# Altium PCB MY-FRIST-PCB.pcbdoc
Units mm, origin at the board's own origin, x right, y up, seen from the top; angles counter-clockwise.
Board outline 208.03 x 106.93 mm, 2 copper layers (Top Layer, Bottom Layer); 28 components, 36 nets, 138 pads, 18 vias.
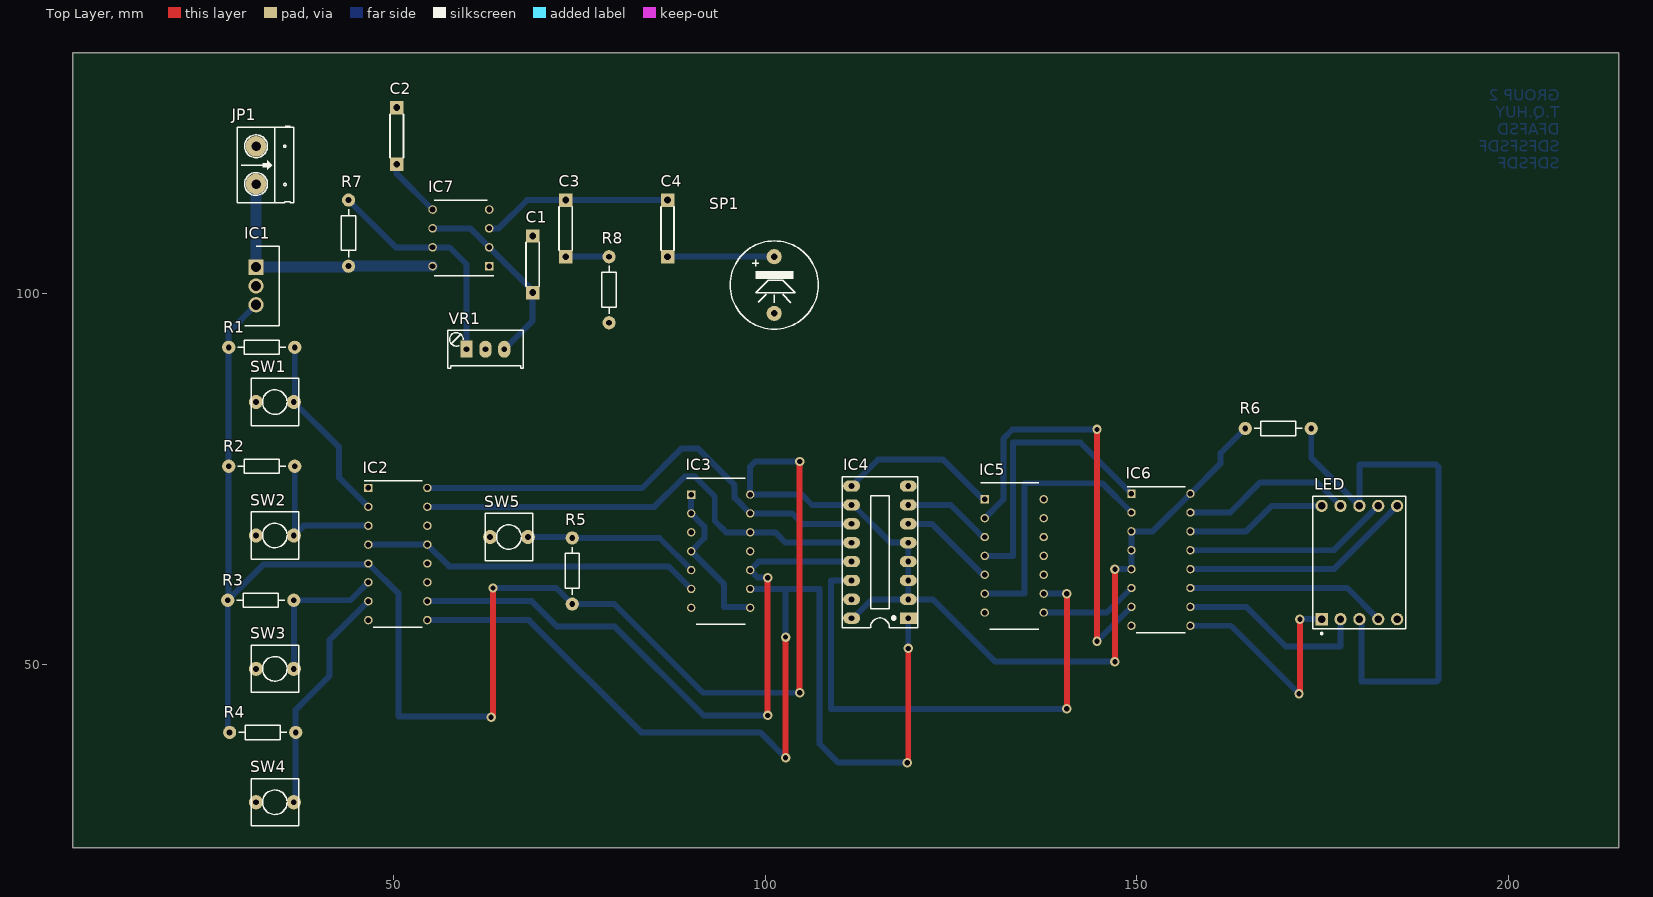
[diagram p0: Top Layer view]
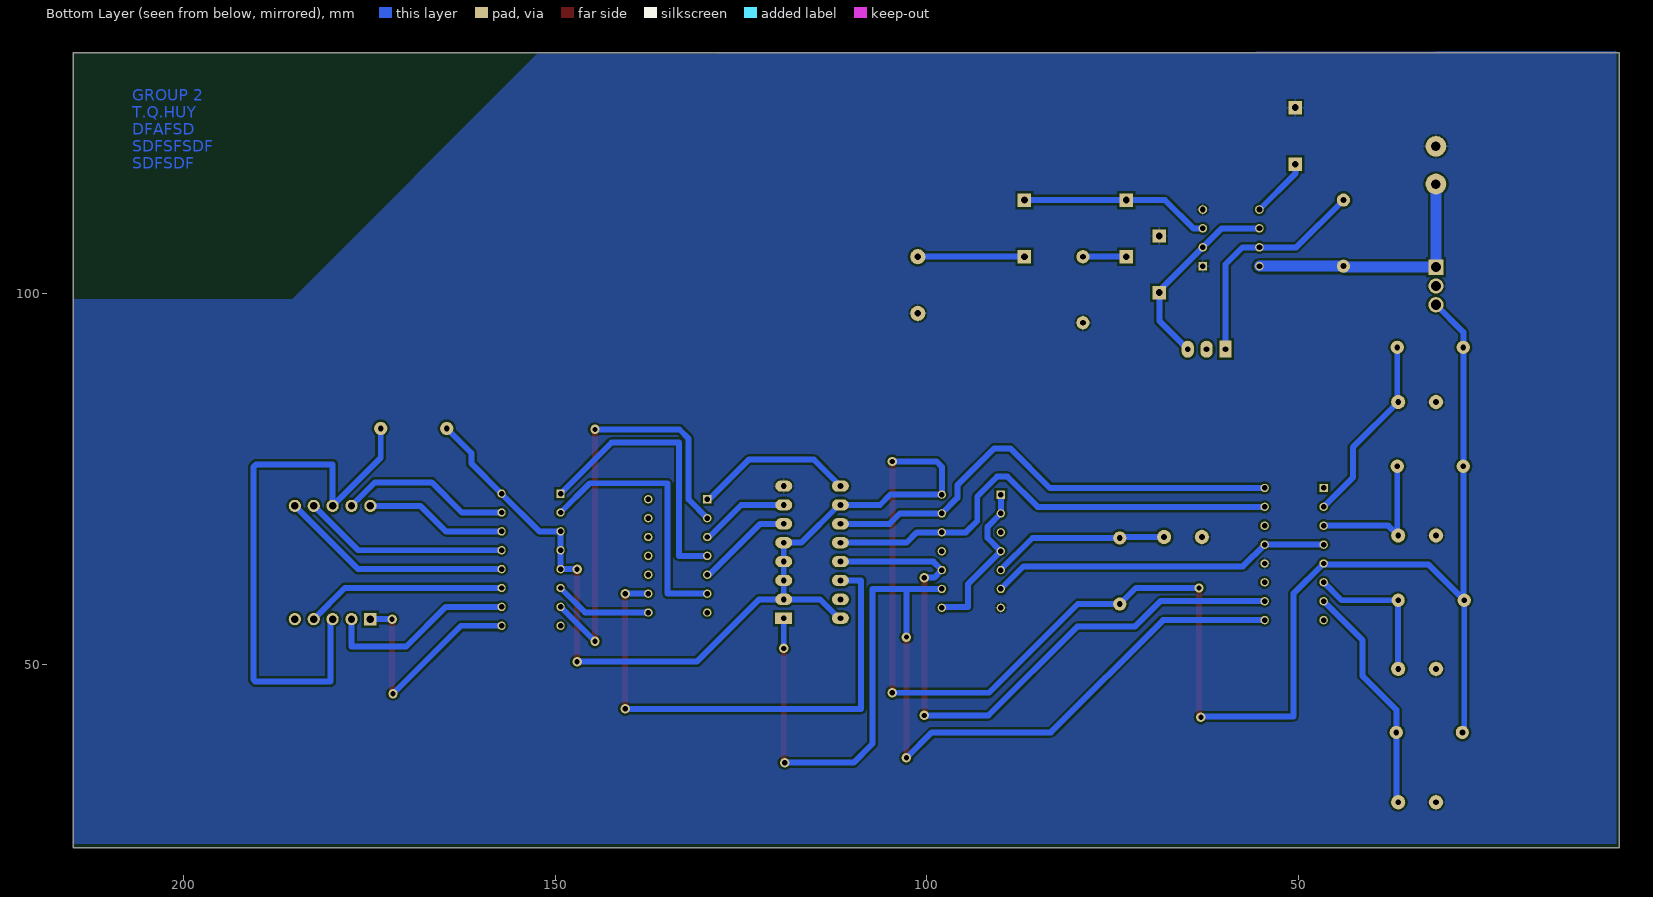
[diagram p1: Bottom Layer view, seen from below]
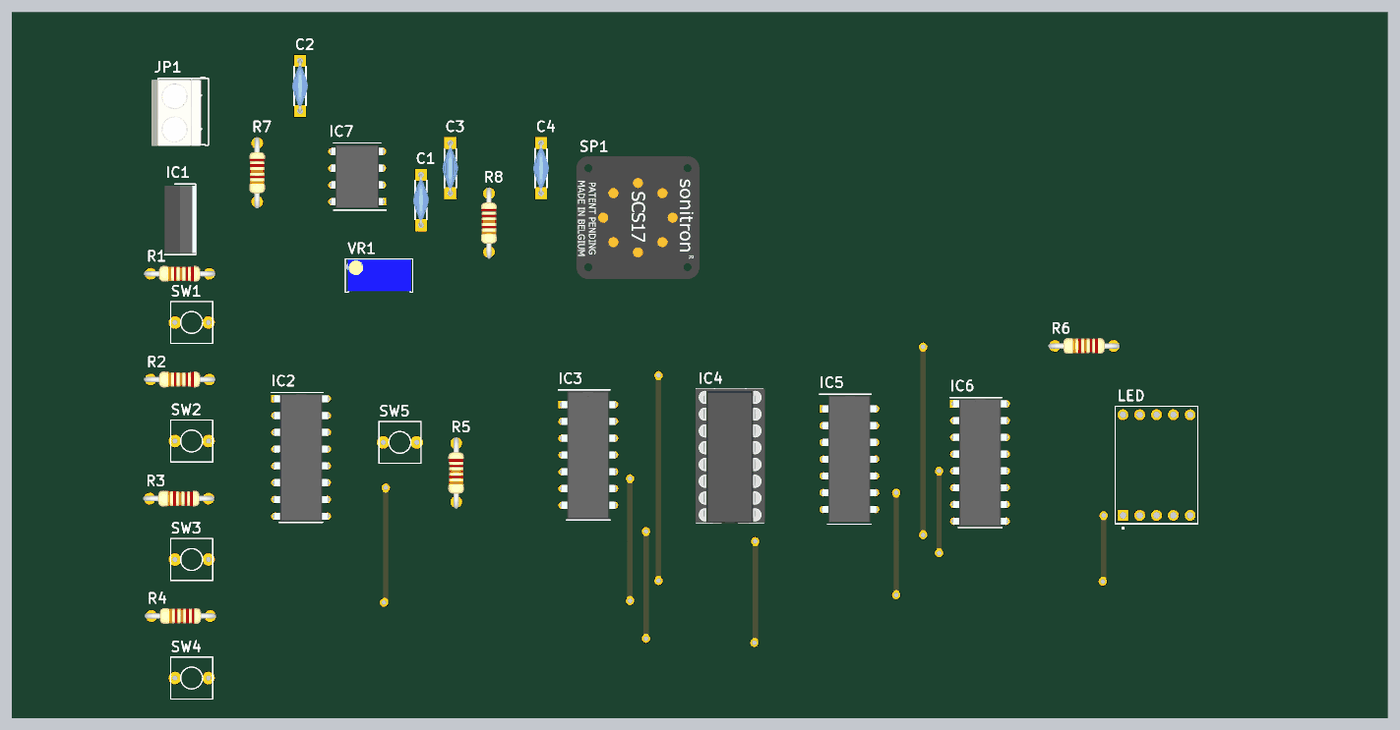
[diagram p2: 3D render of the assembled board from above, using the file's embedded part models]

## Layer stack, top to bottom
Top Solder: solder mask 0.0102, Solder Resist, Dk 3.5
Top Layer: signal copper 0.0356
Dielectric 1: dielectric 0.32, FR-4, Dk 4.8
Bottom Layer: signal copper 0.0356
Bottom Solder: solder mask 0.0102, Solder Resist, Dk 3.5

## Board outline
6.858,25.4 214.884,25.4 214.884,132.334 6.858,132.334

## Design rules (kind name [scope] priority, off if disabled: settings)
Clearance [All] p1: gap=0.3 ignorepadtopadclearanceinfootprint=FALSE
PolygonConnect [All] p1: connectstyle=Relief reliefconductorwidth=0.254 reliefentries=4 polygonreliefangle="90 Angle" airgapwidth=0.254
RoutingVias [All] p1: holewidth=0.711 width=1.27 viastyle="Through Hole" minholewidth=0.711 minwidth=1.27 maxholewidth=0.711 maxwidth=1.27
SolderMaskExpansion [All] p1: expansion=0.102
Width [All] p1: maxlimit=1.5 minlimit=0.8 preferedwidth=0.8
30 further rules are at their usual default settings.

## Components (designator, comment, footprint, x,y, rotation, side; value= is the part's Value field where it differs from the comment)
C1 "0.033u" 103/2KV 68.707,100.076 r90 top
C2 "0.01u" 103/2KV 50.419,117.348 r90 top
C3 "0.047u" 103/2KV 73.152,104.902 r90 top
C4 "47u" 103/2KV 86.868,104.902 r90 top
IC1 "LM7805ACT" TO254P470X1016X2019-3P 31.496,103.5 r270 top
IC2 "SN74LS75N" DIP794W53P254L1930H508Q16N 50.579,64.897 r0 top
IC3 "SN74LS20N" DIP794W53P254L1930H508Q14N 94.013,65.278 r0 top
IC4 "74147" DIP16/W0.3 119.253,56.261 r90 top
IC5 "SN74LS04N" DIP794W53P254L1930H508Q14N 133.51,64.643 r0 top
IC6 "SN74LS47N" DIP794W53P254L1930H508Q16N 153.256,64.135 r0 top
IC7 "NE555N" DIP762W56P254L959H533Q8N 59.055,107.442 r180 top
JP1 "Header 2_1" HED2 31.496,119.761 r270 top value="Header 2"
LED "HDSP-516G" Case-5 179.959,63.754 r0 top
R1 "1k" R1/4W 27.813,92.71 r0 top value="R1/4W - 1K"
R2 "1k" R1/4W 27.813,76.708 r0 top value="R1/4W - 1K"
R3 "1k" R1/4W 27.686,58.674 r0 top value="R1/4W - 1K"
R4 "1k" R1/4W 27.94,40.894 r0 top value="R1/4W - 1K"
R5 "1k" R1/4W 74.041,58.166 r90 top value="R1/4W - 1K"
R6 "330" R1/4W 164.592,81.788 r0 top value="R1/4W - 1K"
R7 "100K" R1/4W 43.942,103.632 r90 top value="R1/4W - 1K"
R8 "10" R1/4W 78.994,96.012 r90 top value="R1/4W - 1K"
SP1 "Speaker" SPK 101.219,104.902 r270 top value="Speaker Chip"
SW1 "SW" SW2 31.496,85.344 r0 top value="SW chip 2 pin"
SW2 "SW" SW2 31.496,67.395 r0 top value="SW chip 2 pin"
SW3 "SW" SW2 31.496,49.445 r0 top value="SW chip 2 pin"
SW4 "SW" SW2 31.496,31.496 r0 top value="SW chip 2 pin"
SW5 "SW" SW2 62.992,67.183 r0 top value="SW chip 2 pin"
VR1 "10K" VR1 59.817,92.456 r0 top

## Footprints (in the part's own frame and the unit in brackets; to place one, negate y for a bottom-side part, rotate by r counter-clockwise, add the part's x,y. Pads: shape width x height; smd on the part's side, far side on the other; paste and mask are expansions set on the pad)
103/2KV [mm]
  rect 1.8x1.8 hole 0.9: 1(0,0) 2(7.62,0)
  silkscreen extent 0.89,-0.89 6.73,0.89, body extent -0.19,-1.2 7.81,1.19, height 9.03
Case-5 [mm] "LED, 7-Segment Display, 13 mm, RHD; 10 Leads; Row Space 15.24 mm; Pitch 2.54 mm"
  rect 1.65x1.65 hole 1: 1(-5.08,-7.62)
  round 1.65 hole 1: 2(-2.54,-7.62) 3(0,-7.62) 4(2.54,-7.62) 5(5.08,-7.62) 6(5.08,7.62) 7(2.54,7.62) 8(0,7.62) 9(-2.54,7.62) 10(-5.08,7.62)
  silkscreen extent -6.25,-9.67 6.25,8.9
DIP16/W0.3 [mil] "16 PIN, W 300mil, Pin to pin 100mil"
  rect 60x90 hole 31: 1(0,0)
  oval 60x90 hole 31: 2(100,0) 3(200,0) 4(300,0) 5(400,0) 6(500,0) 7(600,0) 8(700,0) 9(700,300) 10(600,300) 11(500,300) 12(400,300) 13(300,300) 14(200,300) 15(100,300) 16(0,300)
  silkscreen extent -50,-50 750,350, body extent -52,-57 752,356, height 299
DIP762W56P254L959H533Q8N [mm]
  rect 1.16x1.16 hole 0.76: 1(-3.81,3.81)
  round 1.16 hole 0.76: 2(-3.81,1.27) 3(-3.81,-1.27) 4(-3.81,-3.81) 5(3.81,-3.81) 6(3.81,-1.27) 7(3.81,1.27) 8(3.81,3.81)
  silkscreen extent -4.39,-5.08 3.55,5.08, body extent -3.95,-4.79 3.95,4.79, height 5.33
DIP794W53P254L1930H508Q14N [mm]
  rect 1.13x1.13 hole 0.73: 1(-3.97,7.62)
  round 1.13 hole 0.73: 2(-3.97,5.08) 3(-3.97,2.54) 4(-3.97,0) 5(-3.97,-2.54) 6(-3.97,-5.08) 7(-3.97,-7.62) 8(3.97,-7.62) 9(3.97,-5.08) 10(3.97,-2.54) 11(3.97,0) 12(3.97,2.54) 13(3.97,5.08) 14(3.97,7.62)
  silkscreen extent -4.53,-9.84 3.3,9.84, body extent -4.1,-9.65 4.1,9.65, height 5.08
DIP794W53P254L1930H508Q16N [mm]
  rect 1.13x1.13 hole 0.73: 1(-3.97,8.89)
  round 1.13 hole 0.73: 2(-3.97,6.35) 3(-3.97,3.81) 4(-3.97,1.27) 5(-3.97,-1.27) 6(-3.97,-3.81) 7(-3.97,-6.35) 8(-3.97,-8.89) 9(3.97,-8.89) 10(3.97,-6.35) 11(3.97,-3.81) 12(3.97,-1.27) 13(3.97,1.27) 14(3.97,3.81) 15(3.97,6.35) 16(3.97,8.89)
  silkscreen extent -4.53,-9.84 3.3,9.84, body extent -4.1,-9.65 4.1,9.65, height 5.08
HED2 [mil] "Header 2, 2 pin, hight 300mil, Pin to Pin 200, Colour Green"
  round 110 hole 50: 1(0,0) 2(200,0)
  silkscreen extent -106,-100 300,200, body extent -92,-140 302,155, height 394
R1/4W [mil] "R 1/4W, 2 Pin, 350mil"
  round 70 hole 31: 1(0,0) 2(350,0)
  silkscreen extent 48,-38 302,38, body extent -40,-47 386,47, height 111
SPK [mil] "Speaker Chip"
  round 80 hole 35: 1(0,0) 2(300,0)
  silkscreen extent -84,-234 384,234, body extent -221,-354 511,378, height 344
SW2 [mil] "SW button 2pin, 250x 250 mil"
  round 75 hole 31: 1(0,0) 2(200,0)
  silkscreen extent -25,-125 225,125
TO254P470X1016X2019-3P [mm]
  rect 2.055x2.055 hole 1.37: 1(0,0)
  round 2.055 hole 1.37: 2(2.535,0) 3(5.07,0)
  silkscreen extent -2.8,-1.55 7.87,3.15, body extent -2.55,-1.55 7.61,3.15, height 18.54
VR1 [mil] "Variable Resistor"
  rect 65x90 hole 30: 1(0,0)
  oval 65x90 hole 30: 2(100,0) 3(200,0)
  silkscreen extent -100,-100 301,100, body extent -87,-94 289,96, height 455

## Part data
C1 C2 C3 C4: library part "Cap 2KV", "Capacitor Ceramic 2KV", LatestRevisionDate=17-Jul-2002, LatestRevisionNote="Re-released for DXP Platform.", PackageReference=RAD-0.3, Published=8-Jun-2000, Publisher="Altium Limited"
IC1: "Integrated Circuit", Manufacturer_Name="ON Semiconductor", Mouser Part Number=512-LM7805ACT, Arrow Part Number=LM7805ACT, Arrow Price/Stock=https://www.arrow.com/en/products/lm7805act/on-semiconductor, Datasheet Link=https://componentsearchengine.com/Datasheets/2/LM7805ACT.pdf, Height=4.7mm, Manufacturer_Part_Number=LM7805ACT, Mouser Price/Stock=https://www.mouser.co.uk/ProductDetail/ON-Semiconductor-Fairchild/LM7805ACT?qs=VOMQJJE%252BBNlQknJDd4ZVLg%3D%3D
IC2: "Integrated Circuit", Manufacturer_Name="Texas Instruments", Mouser Part Number=595-SN74LS75N, Arrow Part Number=SN74LS75N, Arrow Price/Stock=https://www.arrow.com/en/products/sn74ls75n/texas-instruments, Datasheet Link=http://www.ti.com/lit/gpn/SN74LS75, Height=5.08mm, Manufacturer_Part_Number=SN74LS75N, Mouser Price/Stock=https://www.mouser.com/Search/Refine.aspx?Keyword=595-SN74LS75N
IC3: "Integrated Circuit", Manufacturer_Name="Texas Instruments", Mouser Part Number=595-SN74LS20N, Datasheet Link=http://www.ti.com/lit/ds/symlink/sn74ls20.pdf, Height=5.08mm, Manufacturer_Part_Number=SN74LS20N, Mouser Price/Stock=https://www.mouser.com/Search/Refine.aspx?Keyword=595-SN74LS20N
IC4: "10-Line to 4-Line Priority Encoder", Copyright by=VanDungEvn@Gmail.com
IC5: "Integrated Circuit", Manufacturer_Name="Texas Instruments", Mouser Part Number=595-SN74LS04N, Arrow Part Number=SN74LS04N, Arrow Price/Stock=https://www.arrow.com/en/products/sn74ls04n/texas-instruments, Datasheet Link=http://www.ti.com/lit/gpn/sn74ls04, Height=5.08mm, Manufacturer_Part_Number=SN74LS04N, Mouser Price/Stock=https://www.mouser.co.uk/ProductDetail/Texas-Instruments/SN74LS04N/?qs=spW5eSrOWB4DgGWIHPxzvg%3D%3D
IC6: "Integrated Circuit", Manufacturer_Name="Texas Instruments", Mouser Part Number=595-SN74LS47N, Arrow Part Number=SN74LS47N, Arrow Price/Stock=https://www.arrow.com/en/products/sn74ls47n/texas-instruments, Datasheet Link=http://componentsearchengine.com/Datasheets/3/SN74LS47N.pdf, Height=5.08mm, Manufacturer_Part_Number=SN74LS47N, Mouser Price/Stock=https://www.mouser.co.uk/ProductDetail/Texas-Instruments/SN74LS47N?qs=dQtLEVC3WoYMgYd%252BWU5Jaw%3D%3D
IC7: "Integrated Circuit", Manufacturer_Name=ST, Mouser Part Number=N/A, Datasheet Link=http://uk.rs-online.com/web/p/products/0305478, Height=5.33mm, Manufacturer_Part_Number=NE555N, Mouser Price/Stock=https://www.mouser.com/Search/Refine.aspx?Keyword=N%2FA
JP1: "Header, 2-Pin", Manufacturer="Generic Components", Class=Connector
LED: "13 mm Slim Font, Standard Current, Green 7-Segment Display: CC, RH DP", LED_Colour=Green, PackageDocument=01-Oct-2001, ComponentLink1Description="Manufacturer Link", ComponentLink1URL=http://www.agilent.com/, ComponentLink2Description=Datasheet, ComponentLink2URL=http://cp.literature.agilent.com/litweb/pdf/5989-2640EN.pdf, DatasheetDocument=20-Jul-2001, LatestRevisionDate=11-Oct-2004, LatestRevisionNote="Display outline superimposed on PCB Footprint.", LuminousIntensity="450 ucd (Minimum).", PackageReference=Case-5, Published=26-May-2004, Publisher="Altium Limited"
R1 R2 R3 R4 R5 R6 R7 R8: library part R1/4W, "Resistor 1/4W"
SP1: library part SPK, "Speaker Chip"
SW1 SW2 SW3 SW4 SW5: library part SW2, "Switch button 2 pin"
VR1: library part VR, "Var Resistor RM065", RM065-103=1K, RM065-104=10K, RM065-503=5K

## Via types
v1: diameter 1.27, hole 0.711, Top Layer to Bottom Layer, 18 vias

## Nets (pads, with @x,y where several pads share a name; then routed paths per layer and width w, separated by ;. In a path a pad name is that pad's centre, name@x,y a point inside that pad or via, vN(x,y) a via of type N, cw(c..) or ccw(c..) an arc to the next point about the centre after c; other vN are vias at no path point)
1Y: IC5.2 IC6.7 | length 59.9
  Top Layer w0.8: v1(144.653,53.152) v1(144.653,81.661)
  Bottom Layer w0.8: IC5.2 132.05,72.233 132.05,80.421 133.29,81.661 v1(144.653,81.661) ; v1(144.653,53.152) IC6.7
2Y: IC5.4 IC6.1 | length 37.8
  Bottom Layer w0.8: IC5.4 133.35,64.643 133.35,79.883 142.428,79.883 IC6.1
3Y: IC5.6 IC6.2 | length 36.2
  Bottom Layer w0.8: IC5.6 134.874,59.563 134.874,74.422 145.349,74.422 IC6.2
5V: IC1.3 IC2.5 IC3.14 IC4.2 IC4.3 IC4.4 IC4.5 IC4.10 IC4.16 IC6.3 IC6.4 IC6.5 IC6.16 R1.1 R2.1 R3.1 R4.1 R5.1 R6.1 | length 334.3
  Top Layer w0.8: v1(63.119,42.926) 63.373,43.18 v1(63.373,60.325) ; v1(104.648,46.228) v1(104.648,77.343) ; v1(147.066,50.419) v1(147.066,62.865)
  Bottom Layer w0.8: R4.1 27.686,41.148 R3.1 R3.1@27.813,58.801 ; IC1.3 27.813,94.747 R1.1 R2.1 R3.1@27.813,58.801 ; v1(63.119,42.926) 62.992,43.053 50.673,43.053 50.673,59.563 IC2.5 46.482,63.5 32.512,63.5 R3.1@27.813,58.801 ; v1(63.373,60.325) 71.882,60.325 R5.1 79.69,58.166 91.628,46.228 v1(104.648,46.228) ; v1(104.648,77.343) 98.684,77.343 97.983,76.642 IC3.14 104.902,72.898 106.299,71.501 IC4.10 111.824,71.501 116.904,66.421 IC4.5 IC4.4 IC4.3 IC4.2 ; IC4.16 111.824,56.261 114.364,58.801 IC4.2 ; v1(147.066,50.419) 130.937,50.419 122.555,58.801 IC4.2 ; v1(147.066,62.865) IC6.5 IC6.4 IC6.3 152.146,67.945 IC6.16 161.29,77.089 161.29,78.486 R6.1
9: IC2.9 IC3.9 IC4.1 | length 141.1
  Top Layer w0.8: v1(102.743,37.465) v1(102.743,53.721) ; v1(119.126,36.83) 119.253,36.957 v1(119.253,52.197)
  Bottom Layer w0.8: IC2.9 68.199,56.007 83.312,40.894 99.314,40.894 v1(102.743,37.465) ; IC3.9 97.994,60.187 100.966,60.187 100.977,60.198 102.743,60.198 ; v1(102.743,53.721) 102.743,60.198 ; v1(119.126,36.83) 109.855,36.83 107.315,39.37 107.315,60.198 102.743,60.198 ; v1(119.253,52.197) IC4.1
10: IC2.10 IC3.10 IC4.13 | length 87.6
  Top Layer w0.8: v1(100.33,43.18) v1(100.33,61.722)
  Bottom Layer w0.8: IC2.10 68.58,58.547 72.009,55.118 79.756,55.118 91.694,43.18 v1(100.33,43.18) ; v1(100.33,61.722) 98.999,61.722 IC3.10 99.126,63.881 IC4.13
12V: IC1.1 IC7.8 JP1.2 R7.1 | length 35
  Bottom Layer w1.5: JP1.2 IC1.1 43.81,103.5 R7.1 IC7.8
15: IC2.15 IC3.12 IC4.12 | length 64.4
  Bottom Layer w0.8: IC2.15 85.09,71.247 89.154,75.311 90.551,75.311 93.218,72.644 93.218,69.342 94.742,67.818 IC3.12 101.346,67.818 102.743,66.421 IC4.12
16: IC2.16 IC3.13 IC4.11 | length 64.5
  Bottom Layer w0.8: IC2.16 83.439,73.787 88.773,79.121 90.932,79.121 95.885,74.168 95.885,72.456 IC3.13 103.632,70.358 105.029,68.961 IC4.11
EN1: IC3.1 IC3.2 IC3.4 IC3.8 | length 22
  Bottom Layer w0.8: IC3.1 IC3.2 91.821,68.58 91.821,67.056 IC3.4 94.488,60.833 94.488,57.785 97.856,57.785 IC3.8
EN2: IC2.4 IC2.13 IC3.6 | length 45.9
  Bottom Layer w0.8: IC2.4 IC2.13 57.47,63.246 86.995,63.246 IC3.6
GND: C1.2 C2.2 IC1.2 IC2.12 IC3.7 IC4.8 IC7.1 IC7.4 JP1.1 R8.1 SP1.2 SW1.1 SW2.1 SW3.1 SW4.1 SW5.1
NetC1_1: C1.1 IC7.2 IC7.6 VR1.3 | length 26.4
  Bottom Layer w0.8: IC7.6 60.325,108.712 IC7.2 68.707,100.33 C1.1 68.707,96.266 VR1.3
NetC2_1: C2.1 IC7.5 | length 8.1
  Bottom Layer w0.8: C2.1 50.419,116.078 IC7.5
NetC3_1: C3.1 R8.2 | length 5.8
  Bottom Layer w0.8: C3.1 R8.2
NetC3_2: C3.2 C4.2 IC7.3 | length 25.6
  Bottom Layer w0.8: IC7.3 64.135,108.712 67.945,112.522 C3.2 C4.2
NetC4_1: C4.1 SP1.1 | length 14.4
  Bottom Layer w0.8: C4.1 SP1.1
NetIC2_2: IC2.2 R1.2 SW1.2 | length 25.7
  Bottom Layer w0.8: R1.2 36.703,85.471 SW1.2 42.672,79.248 42.672,75.184 IC2.2
NetIC2_3: IC2.3 R2.2 SW2.2 | length 19.8
  Bottom Layer w0.8: SW2.2 SW2.2@36.703,67.522 ; R2.2 SW2.2@36.703,67.522 ; IC2.3 37.888,68.707 SW2.2@36.703,67.522
NetIC2_6: IC2.6 R3.2 SW3.2 | length 20.3
  Bottom Layer w0.8: SW3.2 R3.2 44.196,58.674 IC2.6
NetIC2_7: IC2.7 R4.2 SW4.2 | length 31.2
  Bottom Layer w0.8: SW4.2 36.83,31.75 R4.2 36.83,43.942 41.402,48.514 41.402,53.34 IC2.7
NetIC3_5: IC3.5 R5.2 SW5.2 | length 23.9
  Bottom Layer w0.8: SW5.2 73.914,67.183 R5.2 85.786,67.056 IC3.5@90.104,62.738
NetIC4_6: IC4.6 IC5.5 | length 12.9
  Bottom Layer w0.8: IC4.6 122.428,68.961 IC5.5@129.286,62.103
NetIC4_7: IC4.7 IC5.3 | length 11.8
  Bottom Layer w0.8: IC4.7 124.968,71.501 IC5.3@129.286,67.183
NetIC4_9: IC4.9 IC5.1 | length 21.3
  Bottom Layer w0.8: IC4.9 115.189,77.597 123.952,77.597 IC5.1@129.286,72.263
NetIC4_14: IC4.14 IC5.9 | length 70.6
  Top Layer w0.8: v1(140.589,44.069) v1(140.589,59.563)
  Bottom Layer w0.8: IC4.14@111.506,61.214 IC4.14 108.839,61.341 108.839,44.069 v1(140.589,44.069) ; IC5.9 v1(140.589,59.563)
NetIC5_8: IC5.8 IC6.6 | length 13.4
  Bottom Layer w0.8: IC5.8@137.226,57.023 145.984,57.023 IC6.6
NetIC6_9: IC6.9 LED.1 | length 31.4
  Top Layer w0.8: v1(171.831,46.101) 171.958,46.228 v1(171.958,56.134)
  Bottom Layer w0.8: IC6.9 162.687,55.245 v1(171.831,46.101) ; v1(171.958,56.134) LED.1
NetIC6_10: IC6.10 LED.2 | length 26.1
  Bottom Layer w0.8: IC6.10 164.719,57.785 170.053,52.451 177.419,52.451 LED.2
NetIC6_11: IC6.11 LED.4 | length 27
  Bottom Layer w0.8: IC6.11 178.308,60.325 LED.4
NetIC6_12: IC6.12 LED.6 | length 31.3
  Bottom Layer w0.8: IC6.12 176.53,62.865 LED.6
NetIC6_13: IC6.13 LED.7 | length 27.7
  Bottom Layer w0.8: IC6.13 176.53,65.405 LED.7
NetIC6_14: IC6.14 LED.10 | length 19.1
  Bottom Layer w0.8: IC6.14 164.719,67.945 168.148,71.374 LED.10
NetIC6_15: IC6.15 LED.9 | length 23.2
  Bottom Layer w0.8: IC6.15 162.56,70.485 166.624,74.549 174.244,74.549 LED.9
NetIC7_7: IC7.7 R7.2 VR1.1 | length 30.9
  Bottom Layer w0.8: R7.2 50.292,106.172 IC7.7 57.531,106.172 59.817,103.886 VR1.1
NetLED_3: LED.3 LED.8 R6.2 | length 77.1
  Bottom Layer w0.8: R6.2 173.482,77.851 LED.8 179.959,76.962 190.246,76.962 190.627,76.581 190.627,48.006 190.373,47.752 180.213,47.752 180.213,55.88 LED.3
pads on no net: IC2.1 IC2.8 IC2.11 IC2.14 IC3.3 IC3.11 IC4.15 IC5.7 IC5.10 IC5.11 IC5.12 IC5.13 IC5.14 IC6.8 LED.5 VR1.2

## Polygon pours and split planes (outlines as drawn)
GND on Bottom Layer "Bottom Layer-No Net" (solid, pour order 2): 7.112,132.588 7.239,132.461 7.239,25.908 215.011,25.908 214.884,26.035 214.884,99.187 185.42,99.187 152.4,132.207

## Other copper
Bottom Layer:
  text "GROUP 2  / T.Q.HUY / DFAFSD / SDFSFSDF / SDFSDF" at 206.883,116.713 h1.52